# Altium PCB ROS_CAR.PcbDoc (part 2 of 13)
Units mil, origin at the board's own origin, x right, y up, seen from the top; angles counter-clockwise.
Board outline 3937.01 x 3937.01 mil, 2 copper layers (Top Layer, Bottom Layer); 201 components, 155 nets, 998 pads, 0 vias.
Unrouted connection lines stored in the file: 3.
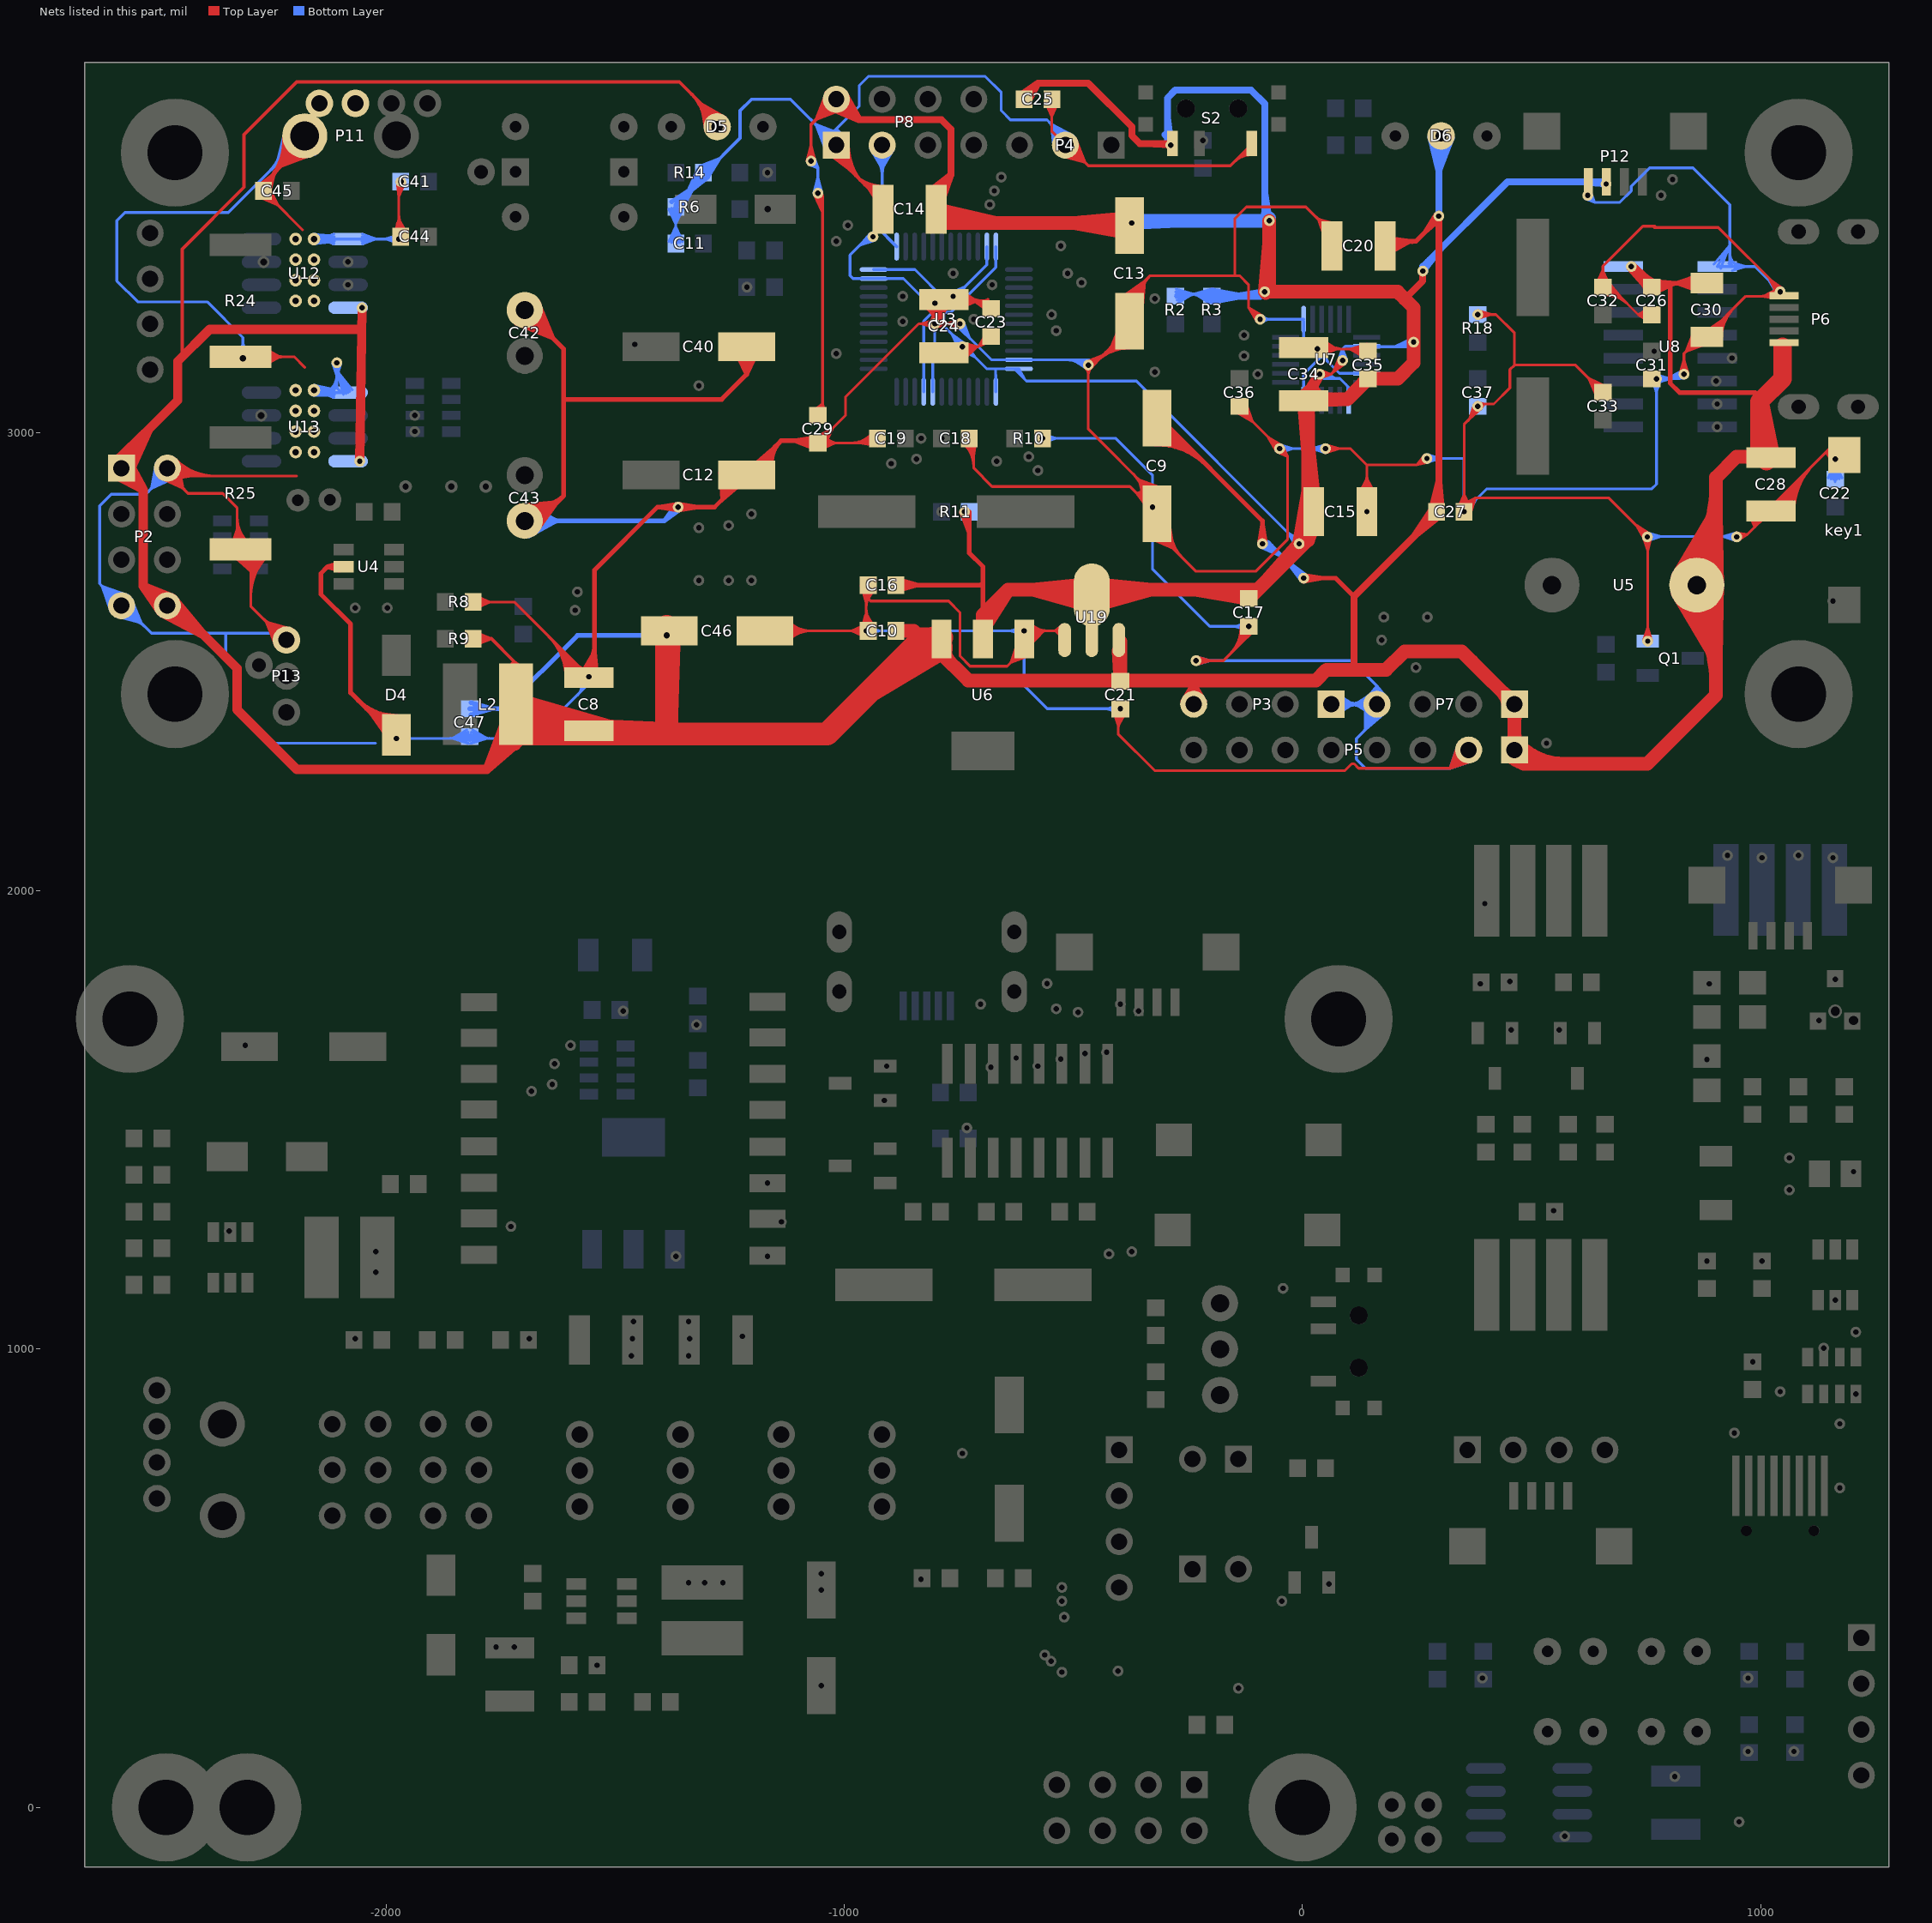
[diagram p2: the nets of this part, all layers, seen from the top]

## Nets (pads, with @x,y where several pads share a name; then routed paths per layer and width w, separated by ;. In a path a pad name is that pad's centre, name@x,y a point inside that pad or via, vN(x,y) a via of type N, cw(c..) or ccw(c..) an arc to the next point about the centre after c; other vN are vias at no path point) (continued)
CARVCC3.3: C13.1 C14.1 C15.1 C16.1 C17.1 C23.1 C24.1 C25.1 C29.1 C34.1 C35.2 P8.2 P12.3 pad.1@37.52,3127.09 pad.1@87.52,3157.09 pad.1@242.52,3197.09 pad.1@262.52,3352.09 pad.1@662.52,3542.09 pad.1@-7.48,2757.09 pad.1@-72.48,3462.09 pad.1@-82.48,3307.09 pad.1@-287.48,3627.09 pad.1@-372.48,3457.09 pad.1@-737.48,2827.09 pad.1@-742.48,3187.09 pad.1@-1057.48,3522.09 pad.1@-1072.48,3592.09 R2.1 R3.1 R11.1 S2.3 U3.1 U3.9 U3.24 U3.36 U3.48 U6.2 U7.8 U7.13 U19.2 | length 20620.8
  Top Layer w6: C24.1@-753.78,3187.7 -710.43,3187.09 ; C24.1@-753.45,3181.67 -710.43,3187.09 ; C24.1@-753.27,3193.79 -710.43,3187.09 ; C24.1@-750.79,3190.02 C24.1@-751.77,3174.02 ; C24.1@-750.02,3173.49 cw(c-731.71,3167.97) C24.1@-731.71,3187.09 ; C24.1@-748.74,3166.79 -710.43,3187.09 ; C24.1@-745.55,3161.66 -710.43,3187.09 ; C24.1@-744.27,3171.75 cw(c-723.63,3165.53) -723.63,3187.09 ; C24.1@-741.63,3156.97 -710.43,3187.09 ; C24.1@-741.12,3178.38 -712.2,3187.36 ; C24.1@-741.12,3195.79 -712.36,3186.84 ; C24.1@-738.53,3170.02 cw(c-715.56,3163.1) -715.56,3187.09 ; C24.1@-736.98,3180.21 C24.1@-751.77,3174.02 ; C24.1@-736.25,3180.86 cw(c-721.21,3165.82) -721.21,3187.09 cw(c-721.21,3208.36) C24.1@-736.25,3193.32 ; C24.1@-732.78,3168.29 cw(c-707.48,3160.66) -707.48,3187.09 ; -705.31,3188.98 ccw(c-727.53,3214.46) C23.1@-693.75,3216.05 ; -705.07,3189.5 ccw(c-732.34,3216.77) C23.1@-693.77,3216.77 ; -704.3,3190.34 ccw(c-730.72,3216.18) C23.1@-693.77,3216.6 ; -702.47,3190.31 ccw(c-713.96,3208.15) C23.1@-693.34,3213.16 ; -701.26,3189.91 ccw(c-708.12,3205.02) C23.1@-692.69,3211.13 ; -699.54,3196.62 ccw(c-719.27,3213.04) C23.1@-693.71,3215.38 ; C23.1@-695.95,3197.14 ccw(c-711.71,3215.21) C23.1@-687.76,3216.33 ; C23.1@-695.53,3192.51 ccw(c-702.26,3207.34) C23.1@-687.12,3213.34 ; C23.1@-695.38,3194.88 ccw(c-705.29,3210.26) C23.1@-687.51,3214.58 ; C23.1@-694.83,3199.74 ccw(c-711.86,3216.77) C23.1@-687.77,3216.77 ; C23.1@-694.17,3200.7 ccw(c-710.24,3216.41) C23.1@-687.77,3216.67 ; C23.1@-687.48,3207.09 -707.48,3187.09 ; C23.1@-685.81,3222.49 -707.48,3187.09 ; C34.1@-13.06,3081.63 27.52,3117.09 ; C34.1@-8.81,3077.29 27.52,3117.09 ; C34.1@-4.14,3073.48 27.52,3117.09 ; C34.1@2.52,3069.35 27.52,3117.09 ; C34.1@9.71,3066.23 27.52,3117.09 ; C34.1@15.5,3064.56 27.52,3117.09 ; C34.1@19.2,3083.38 ccw(c-0.87,3103.45) 27.52,3103.45 ; C34.1@21.48,3063.54 27.52,3117.09 ; C34.1@27.52,3085.86 cw(c73.3,3085.86) pad.1@43.29,3120.43 ; C34.1@27.52,3087.09 27.52,3117.09 ; 27.52,3094.66 ccw(c50.11,3094.66) C34.1@37.57,3075.87 ; 27.52,3099.01 cw(c61.89,3099.01) pad.1@39.36,3124.96 ; 27.52,3105.87 ccw(c57.58,3105.87) C34.1@40.9,3080.86 ; 27.52,3112.16 cw(c50.47,3112.16) pad.1@35.43,3129.5 ; pad.1@28.82,3128.45 C34.1@27.52,3091.81 ; pad.1@28.95,3129.12 C34.1@24.69,3092 ; pad.1@29.13,3129.78 22.14,3093.58 ; pad.1@29.35,3130.4 19.93,3095.43 ; pad.1@29.69,3131.13 17.61,3098.16 ; pad.1@30.07,3131.79 15.78,3100.91 ; pad.1@30.4,3132.27 13.99,3102.27 ; pad.1@30.75,3132.73 12.53,3103.98 ; pad.1@39.07,3118.41 62.52,3127.09 ; pad.1@39.07,3135.76 62.52,3127.09 ; pad.1@42.61,3119.9 12.53,3103.98 ; pad.1@43.08,3120.25 13.99,3102.27 ; pad.1@43.51,3120.63 15.78,3100.91 ; pad.1@43.75,3120.86 cw(c58.79,3105.82) 58.79,3127.09 cw(c58.79,3148.36) pad.1@43.75,3133.32 ; pad.1@44.09,3121.22 17.61,3098.16 ; C34.1@44.23,3085.85 cw(c65.06,3117.08) 27.52,3117.08 ; pad.1@44.64,3121.9 19.93,3095.43 ; pad.1@45.03,3122.48 22.14,3093.58 ; pad.1@45.38,3123.11 C34.1@24.69,3092 ; pad.1@45.65,3123.68 C34.1@27.52,3091.81 ; 68.94,3133.51 ccw(c45.37,3157.09) pad.1@78.71,3157.09 ; 79.19,3143.75 ccw(c65.85,3157.09) pad.1@84.71,3157.09 ; pad.1@80,3161.69 66.33,3130.9 ; 81.01,3145.58 cw(c87.52,3139.08) pad.1@87.52,3148.28 ; pad.1@87.52,3152.09 62.52,3127.09 ; pad.1@87.52,3157.09 66.33,3130.9 ; pad.1@93.59,3150.7 66.33,3130.9 ; C24.1@-751.77,3174.02 pad.1@-742.48,3187.09 ; C24.1@-751.77,3174.02 -710.43,3187.09 ; pad.1@-742.48,3187.09 -712.2,3187.36 ; pad.1@-742.48,3187.09 -710.43,3187.09 ; pad.1@-742.48,3187.09 -712.67,3187.12 ; pad.1@-742.48,3187.09 -712.36,3186.84 ; pad.1@-742.48,3187.09 -707.48,3187.09 ; -712.67,3187.12 -741.17,3178.37 -712.67,3187.09 -741.18,3195.8 -712.67,3187.12 ; -712.36,3186.84 -741.26,3178.36 -710.43,3187.09 ; -712.2,3187.36 -741.28,3195.82 -710.43,3187.09 ; 12.53,3103.98 pad.1@37.52,3127.09 ; 13.99,3102.27 pad.1@37.52,3127.09 ; 15.78,3100.91 pad.1@37.52,3127.09 ; 17.61,3098.16 pad.1@37.52,3127.09 ; 19.93,3095.43 pad.1@37.52,3127.09 ; 22.14,3093.58 pad.1@37.52,3127.09 ; C34.1@24.69,3092 pad.1@37.52,3127.09 ; C34.1@27.52,3091.81 pad.1@37.52,3127.09 ; 27.52,3117.09 pad.1@37.52,3127.09 ; pad.1@37.52,3127.09 62.52,3127.09
  Top Layer w7: pad.1@-1080.72,3593.14 -1072.48,3624.9 pad.1@-1064.24,3593.14 ; pad.1@-1078.36,3597.96 ccw(c-1092.54,3612.15) -1072.48,3612.15 ccw(c-1052.42,3612.15) pad.1@-1066.6,3597.96 ; pad.1@-1072.48,3592.09 -1072.48,3672.09 P8.2@-1017.48,3727.09 ; C29.1@-1068.41,3046.19 -1047.48,3062.09 ; pad.1@-1065.32,3519.33 -1047.48,3481.18 ; pad.1@-1063.36,3516.21 cw(c-1101.69,3477.88) -1047.48,3477.88 ; C29.1@-1063.35,3041.14 -1047.48,3062.09 ; pad.1@-1058.41,3521.16 cw(c-1084.79,3494.78) -1047.48,3494.78 ; C29.1@-1057.48,3037.4 -1057.48,3052.09 -1047.48,3062.09 ; C29.1@-1056.5,3037.4 -1047.48,3062.09 ; pad.1@-1053.46,3526.11 cw(c-1067.89,3511.68) -1047.48,3511.68 ; pad.1@-1049.25,3523.25 -1047.48,3481.18 ; C29.1@-1048.85,3035.84 -1047.48,3062.09 ; P8.2@-1043.51,3727.09 cw(c-1106.34,3727.09) -1061.91,3682.66 cw(c-1017.48,3638.22) P8.2@-1017.48,3701.06 ; C29.1@-1041.72,3036.45 -1047.48,3062.09 ; P8.2@-1039.3,3741.27 -1061.86,3682.71 ; P8.2@-1036.51,3727.09 cw(c-1082.44,3727.09) -1049.96,3694.6 cw(c-1017.48,3662.12) P8.2@-1017.48,3708.06 ; P8.2@-1032.82,3738.35 -1061.86,3682.71 ; P8.2@-1026.76,3734.74 -1061.86,3682.71 ; P8.2@-1021.17,3730.5 -1061.86,3682.71 ; P8.2@-1014.07,3723.39 -1061.86,3682.71 ; P8.2@-1009.83,3717.81 -1061.86,3682.71 ; P8.2@-1006.22,3711.75 -1061.86,3682.71 ; P8.2@-1003.29,3705.27 -1061.86,3682.71 ; -1047.48,3062.09 -1047.48,3512.09 pad.1@-1057.48,3522.09 -1047.48,3481.18
  Top Layer w10: C16.1@-887.17,2667.09 -702.48,2667.09 -697.48,2672.09 ; C16.1@-885.33,2653.91 -838.86,2667.09 C16.1@-885.33,2680.27 ; C16.1@-877.76,2657.68 cw(c-855.04,2634.96) -855.04,2667.09 cw(c-855.04,2699.21) C16.1@-877.76,2676.5 ; C14.1@-815.44,3525.62 -797.48,3542.09 ; C14.1@-807.02,3519.66 -797.48,3542.09 ; C14.1@-803.04,3535.26 ccw(c-804.45,3542.09) -797.48,3542.09 ; C14.1@-799.41,3517.8 -797.48,3542.09 ; C14.1@-797.48,3467.09 -797.48,3542.09 ; C14.1@-792.28,3534.14 cw(c-788.81,3542.09) -797.48,3542.09 ; C14.1@-791.6,3518.44 -797.48,3542.09 ; C14.1@-782.35,3522.99 -797.48,3542.09 ; pad.1@-744,2825.11 -727.48,2782.42 ; pad.1@-742.3,2822.27 cw(c-778.07,2786.5) -727.48,2786.5 ; pad.1@-737.48,2827.09 -727.48,2782.42 ; pad.1@-735.23,2829.34 cw(c-753.92,2810.64) -727.48,2810.64 ; pad.1@-730.74,2828.08 -727.48,2782.42 ; pad.1@-727.48,2827.09 -727.48,2737.09 -697.48,2707.09 -697.48,2602.09 ; U6.2@-697.48,2549.13 U6.2@-697.48,2557.09
  Top Layer w15: P8.2@-1029.34,3708.52 -967.48,3682.09 ; P8.2@-1017.48,3705.06 cw(c-1017.48,3639.81) -971.34,3685.95 ; P8.2@-1000.26,3740.83 -967.48,3682.09 ; P8.2@-995.45,3727.09 ccw(c-954.34,3727.09) -983.41,3698.02 ; C14.1@-810.47,3528.42 -767.48,3562.09 ; C14.1@-799.41,3517.8 -767.48,3562.09 ; C14.1@-797.48,3532.09 -767.48,3562.09 ; C14.1@-785.83,3510.66 -767.48,3562.09 ; C14.1@-784.1,3518.64 cw(c-727.16,3521.76) -767.48,3562.08 ; C25.1@-614.95,3736.17 -577.48,3762.09 ; C25.1@-607.8,3727.09 -607.8,3731.77 -577.48,3762.09 ; C25.1@-607.8,3728.07 -577.48,3762.09 ; C25.1@-607.8,3738.88 ccw(c-607.8,3756.03) C25.1@-595.66,3743.9 ; C25.1@-598.93,3721.89 -577.48,3762.09 ; C25.1@-596.99,3728.07 cw(c-561.96,3728.07) -586.73,3752.84 ; -350.71,3630.32 S2.3@-284.09,3630.32 -340.91,3630.32 pad.1@-287.48,3627.09 -344.52,3630.32 ; -350,3630 -355,3630 -372.48,3647.48 -372.48,3667.09 -467.48,3762.09 -577.48,3762.09 ; -305.68,3630.32 cw(c-305.68,3608.89) S2.3@-290.53,3624.04 ; 223.23,3291.38 262.52,3330.67 pad.1@262.52,3352.09 ; -967.48,3682.09 P8.2@-1017.48,3727.09 -1012.48,3727.09 -967.48,3682.09 ; -967.48,3682.09 -787.48,3682.09 -767.48,3662.09 -767.48,3562.09
  Top Layer w30: C14.1@-799.41,3487.09 -669.93,3457.09 ; C14.1@-792.48,3457.09 pad.1@-372.48,3457.09 ; U6.2@-697.48,2557.09 -697.48,2602.09 ; U6.2@-690.83,2569.8 cw(c-596.82,2569.8) -663.29,2636.27 ; -546.78,2657.09 cw(c-546.78,2558.73) U19.2@-477.23,2628.28 ; -486.71,3454.76 pad.1@-372.48,3457.09 ; -480.03,3458.81 pad.1@-372.48,3457.09 ; -476.24,3456.01 pad.1@-372.48,3457.09 ; U19.2@-464.4,2621.54 -590.4,2657.09 ; U19.2@-460.11,2669.88 -590.4,2657.09 ; U19.2@-459.89,2669.88 -329.3,2657.09 ; U19.2@-455.61,2621.54 -329.3,2657.09 ; U19.2@-442.77,2628.28 cw(c-373.22,2558.73) -373.22,2657.09 ; -430.99,3457.09 cw(c-430.99,3397.91) C13.1@-389.14,3439.75 ; C13.1@-377.83,3467.91 -499.35,3457.09 ; C13.1@-377.48,3451.42 -499.35,3457.09 ; -234.53,2657.09 C17.1@-118.46,2637.4 ; -173.97,2657.09 cw(c-173.97,2581.89) C17.1@-120.8,2635.06 ; pad.1@-80.23,3304.83 ccw(c-98.92,3323.53) -72.48,3323.53 ; -78.18,2676.39 pad.1@-7.48,2757.09 ; -72.48,3360.28 pad.1@-72.48,3462.09 -72.48,3307.09 207.52,3307.09 223.23,3291.38 242.52,3272.09 242.52,3152.09 207.52,3117.09 ; -72.48,3412.08 pad.1@-82.48,3307.09 19.33,3307.09 ; -35.35,2719.21 C17.1@-116.5,2637.4 ; C34.1@-12.48,3072.09 97.83,3072.09 ; pad.1@-5.23,2754.83 ccw(c-48.07,2797.67) C15.1@12.52,2797.67 ; C34.1@-3.02,3063.81 cw(c-40.54,3026.29) 12.52,3026.29 ; pad.1@-1.2,2753.36 ccw(c-44.22,2796.38) C15.1@16.61,2796.38 ; C34.1@2.52,3069.35 12.52,2954.9 ; 12.52,2764.75 cw(c39.87,2764.75) C15.1@27.88,2789.34 ; C15.1@12.52,2869.67 pad.1@-7.48,2757.09 ; 12.52,2905.51 ccw(c72.16,2905.51) C15.1@29.99,2863.34 ; 12.52,2971.44 C15.1@24.45,2857.8 ; C34.1@12.52,3072.09 12.52,2767.09 ; C34.1@33.23,3069.35 97.83,3072.09 ; C34.1@38.77,3063.81 cw(c58.75,3043.83) 58.75,3072.09 ; C35.2@141.54,3116.77 97.83,3072.09 ; C35.2@143.5,3116.77 207.52,3117.09 ; U6.2@-697.48,2569.8 -697.48,2602.09 ; U6.2@-697.48,2569.8 -642.48,2657.09 ; U6.2@-697.48,2569.8 -697.48,2602.09 ; -697.48,2602.09 -642.48,2657.09 ; -642.48,2657.09 -97.48,2657.09 ; -590.4,2657.09 U19.2@-460,2645.51 -329.3,2657.09 ; -499.35,3457.09 -379.36,3435.03 pad.1@-372.48,3457.09 ; C17.1@-116.5,2637.4 -97.48,2657.09 ; C17.1@-116.5,2637.4 -97.48,2657.09 ; -97.48,2657.09 12.52,2767.09 ; pad.1@-7.48,2757.09 12.52,2767.09 ; pad.1@-7.48,2757.09 C15.1@24.45,2796.38 ; pad.1@-7.48,2757.09 12.52,2767.09 ; pad.1@-7.48,2757.09 -48.75,2705.81 C15.1@24.45,2796.38 ; pad.1@-7.48,2757.09 C15.1@24.45,2796.38 ; pad.1@-7.48,2757.09 12.52,2767.09 ; pad.1@-7.48,2757.09 C15.1@24.45,2796.38 ; pad.1@-7.48,2757.09 12.52,2767.09 ; 12.52,2767.09 C15.1@24.45,2796.38 ; 12.52,2767.09 C15.1@24.45,2796.38 ; 97.83,3072.09 142.83,3117.09 207.52,3117.09
  Bottom Layer w6: U3.24@-935.94,3355.35 -845.75,3355.35 -782.48,3292.09 -782.48,3232.09 -689.21,3138.82 U3.48@-619.02,3138.82 -606.31,3115.91 ; U3.24@-910.35,3355.35 -887.43,3355.35 ; U3.9@-826.69,3088.62 -826.69,3242.87 -807.48,3262.09 -767.48,3262.09 -669.21,3360.35 ; U3.9@-826.69,3114.21 -826.69,3137.13 ; -761.06,3210.66 cw(c-784.63,3187.09) pad.1@-751.29,3187.09 ; -750.81,3200.42 cw(c-764.15,3187.09) pad.1@-745.29,3187.09 ; pad.1@-749.98,3182.46 -764.06,3213.66 ; -748.99,3198.59 ccw(c-742.48,3205.1) pad.1@-742.48,3195.9 ; pad.1@-747.11,3179.59 -715.86,3165.47 ; pad.1@-742.48,3178.28 cw(c-742.48,3144.93) -718.9,3168.51 ; pad.1@-742.48,3184.28 cw(c-742.48,3165.42) -729.15,3178.75 ; pad.1@-736.41,3193.47 -764.06,3213.66 ; pad.1@-736.09,3193.16 -715.86,3165.47 ; pad.1@-733.67,3187.09 ccw(c-724.47,3187.09) -730.97,3180.58 ; U3.1@-669.21,3088.62 -670,3138.82 U3.1@-669.21,3114.21 ; U3.36@-669.21,3379.96 -669.21,3360.35 ; U3.36@-669.21,3405.55 -669.21,3360.35 ; -667.53,3138.82 U3.48@-644.61,3138.82 ; U3.48@-627.48,3137.09 -602.48,3112.09 -362.48,3112.09 pad.1@-7.48,2757.09 -32.02,2781.63 ; R2.1@-277.48,3297.09 -272.48,3302.09 R3.1@-202.48,3302.09 ; R2.1@-276.77,3300.7 -239.77,3302.09 ; R2.1@-276.5,3297.4 -239.77,3302.09 ; R2.1@-276.5,3306.71 -239.77,3302.09 ; R2.1@-275.93,3294.14 -239.77,3302.09 ; R2.1@-275.25,3312.66 -239.77,3302.09 ; R2.1@-274.17,3288.39 -239.77,3302.09 ; R2.1@-274.16,3295.06 cw(c-257.2,3278.11) -257.2,3302.09 ; R2.1@-271.46,3282.95 -239.77,3302.09 ; R2.1@-269.91,3290.82 cw(c-242.72,3263.62) -242.72,3302.09 ; R2.1@-265.67,3286.58 cw(c-228.23,3249.14) -228.23,3302.09 ; R2.1@-265.67,3308.23 ccw(c-250.85,3323.05) -250.85,3302.09 ; -246.73,3302.09 cw(c-246.73,3249.14) R3.1@-209.29,3286.58 ; -232.24,3302.09 cw(c-232.24,3263.62) R3.1@-205.05,3290.82 ; -224.11,3302.09 ccw(c-224.11,3323.05) R3.1@-209.29,3308.23 ; -217.76,3302.09 cw(c-217.76,3278.11) R3.1@-200.8,3295.06 ; R3.1@-203.5,3282.95 -235.19,3302.09 ; R3.1@-200.79,3288.39 -235.19,3302.09 ; R3.1@-199.71,3312.66 -235.19,3302.09 ; R3.1@-199.03,3294.14 -235.19,3302.09 ; R3.1@-198.46,3297.4 -235.19,3302.09 ; R3.1@-198.46,3306.71 -235.19,3302.09 ; R3.1@-198.19,3300.7 -235.19,3302.09 ; pad.1@-16.29,2757.09 ccw(c-37.56,2757.09) -22.52,2772.13 ccw(c-7.48,2787.17) pad.1@-7.48,2765.9 ; pad.1@-14.45,2751.7 -32.02,2781.63 ; pad.1@-2.09,2764.06 -32.02,2781.63 ; pad.1@36.33,3118.36 71.83,3117.98 ; pad.1@40.82,3135.26 71.83,3117.98 ; pad.1@78.85,3158.64 87.52,3182.09 ; pad.1@81.29,3163.32 ccw(c66.25,3178.36) 87.52,3178.36 ccw(c108.79,3178.36) pad.1@93.75,3163.32 ; pad.1@87.52,3157.09 87.52,3182.09 ; 94.74,3104.86 cw(c84.41,3094.53) U7.13@99.02,3094.53 ; pad.1@96.19,3158.64 87.52,3182.09 ; U7.13@100.94,3069.92 100.94,3098.66 81.63,3117.98 46.63,3117.98 pad.1@37.52,3127.09 71.83,3117.98 ; U7.8@115.71,3188.03 93.46,3188.03 ; U7.8@140.31,3188.03 93.46,3188.03 ; -764.06,3213.66 pad.1@-742.48,3187.09 -715.86,3165.47 ; 87.52,3182.09 93.46,3188.03
  Bottom Layer w7: pad.1@-1077.09,3585.17 -1057.48,3577.09 ; pad.1@-1072.48,3583.78 cw(c-1072.48,3563.71) -1058.29,3577.9 cw(c-1044.1,3592.09) pad.1@-1064.17,3592.09 ; pad.1@-1072.48,3592.09 -1057.48,3577.09 ; pad.1@-1065.72,3523.14 -1057.48,3554.9 pad.1@-1049.24,3523.14 ; pad.1@-1065.57,3596.7 -1057.48,3577.09 ; pad.1@-1063.36,3527.96 ccw(c-1077.54,3542.15) -1057.48,3542.15 ccw(c-1037.42,3542.15) pad.1@-1051.6,3527.96 ; pad.1@-1057.48,3522.09 -1057.48,3577.09 ; U7.8@152.52,3187.09 232.52,3187.09 pad.1@242.52,3197.09 202.65,3187.09 ; U7.8@164.92,3188.03 190.85,3187.09 ; U7.8@165.93,3189.04 ccw(c170.63,3193.74) 170.63,3187.09 ; 198.31,3187.09 ccw(c198.31,3241.29) pad.1@236.64,3202.96 ; 215.21,3187.09 ccw(c215.21,3224.39) pad.1@241.59,3198.01 ; 232.11,3187.09 ccw(c232.11,3207.49) pad.1@246.54,3193.06 ; pad.1@239.69,3204.9 202.65,3187.09 ; pad.1@243.72,3188.86 202.65,3187.09
  Bottom Layer w15: -300,3649.61 cw(c-320.04,3629.56) pad.1@-291.78,3627.41 ; -295,3655.65 ccw(c-258.92,3655.65) pad.1@-284.43,3630.14 ; -295,3685.64 pad.1@-287.48,3627.09 ; pad.1@-287.48,3637.09 -295,3644.61 ; pad.1@-285.87,3631.09 cw(c-280.42,3644.61) -295,3644.61 ; R3.1@-197.48,3297.4 -92.17,3297.4 pad.1@-82.48,3307.09 -146.11,3297.4 ; R3.1@-196.5,3297.4 -133.19,3297.4 ; R3.1@-195.57,3286.63 -133.19,3297.4 ; R3.1@-195.57,3308.17 -133.19,3297.4 ; R3.1@-188.85,3289.76 cw(c-170.41,3271.31) -170.41,3297.4 cw(c-170.41,3323.49) R3.1@-188.85,3305.04 ; -116.27,3297.4 ccw(c-116.27,3340.88) pad.1@-85.53,3310.14 ; -83.38,3477.98 cw(c-99.27,3462.09) pad.1@-76.79,3462.09 ; -82.48,3496.64 ccw(c-37.93,3496.64) pad.1@-69.43,3465.14 ; -82.48,3522.27 pad.1@-72.48,3462.09 ; pad.1@-72.48,3467.09 -82.48,3477.09 ; pad.1@-72.28,3466.39 cw(c-71.78,3477.09) -82.48,3477.09 ; pad.1@262.52,3352.09 302.37,3401.93 ; pad.1@262.52,3357.09 262.52,3362.09 447.52,3547.09 pad.1@652.52,3547.09 ; pad.1@266.83,3352.09 cw(c301.38,3352.09) 276.95,3376.52 ; 602.46,3547.09 pad.1@662.52,3542.09 ; 640.04,3547.09 cw(c640.04,3519.61) pad.1@659.47,3539.04 ; -295,3644.61 pad.1@-287.48,3627.09 ; -295,3644.61 pad.1@-287.48,3627.09 ; -295,3644.61 -295,3729.57 -277.48,3747.09 -112.48,3747.09 -82.48,3717.09 -82.48,3477.09 ; -82.48,3477.09 pad.1@-72.48,3462.09 ; -82.48,3477.09 pad.1@-72.48,3462.09
  Bottom Layer w30: pad.1@-372.48,3457.09 -269.15,3462.09 ; pad.1@-367.48,3462.09 pad.1@-72.48,3462.09 pad.1@-72.48,3467.09
CARVCC5: C8.1 C9.1 C10.2 C20.1 C21.1 C26.2 C27.1 C28.2 C30.1 C46.1 C47.1 D5.2 D6.2 L2.2 P2.1 P2.8 P3.4 P5.1 P6.5 P7.1 pad.1@2.52,2682.09 pad.1@297.52,3472.09 pad.1@717.52,3362.09 pad.1@-87.48,2757.09 pad.1@-2052.48,3272.09 pad.1@-2057.48,2937.09 pad.11@-1387.48,2557.09 R9.1 U5.1 U6.3 U8.16 U12.4 U13.4 U19.3 | length 26392.9
  Top Layer w7: -2445,3170 -2445,3400 -2310,3535 -2310,3650 -2195,3765 -1360,3765 -1333.33,3738.33 -1333.33,3737.93 -1332.93,3737.93 D5.2@-1270,3675 ; R9.1@-1810.16,2550.08 -1770.47,2550.08 -1720.47,2500.08 ; R9.1@-1809.38,2542.31 -1770.85,2550.08 ; R9.1@-1809.38,2557.85 -1770.85,2550.08 ; R9.1@-1807.37,2535.54 -1770.85,2550.08 ; R9.1@-1807.37,2564.62 -1770.85,2550.08 ; R9.1@-1804.64,2544.56 cw(c-1791.31,2531.23) -1791.31,2550.08 cw(c-1791.31,2568.93) R9.1@-1804.64,2555.6 ; R9.1@-1799.69,2539.61 cw(c-1774.41,2514.33) -1774.41,2550.08 cw(c-1774.41,2585.83) R9.1@-1799.69,2560.55 ; L2.2@-1748.64,2468.92 -1720.47,2500.08 ; L2.2@-1742.65,2464.41 -1720.47,2500.08 ; L2.2@-1736.15,2461.11 -1720.47,2500.08 ; L2.2@-1729.34,2459.02 -1720.47,2500.08 ; L2.2@-1727.43,2490.34 ccw(c-1730.76,2500.08) -1720.47,2500.08 ; L2.2@-1722.36,2458.12 -1720.47,2500.08 ; L2.2@-1720.47,2445.08 -1720.47,2500.08 ; L2.2@-1713.15,2492.01 cw(c-1712.36,2500.08) -1720.47,2500.08 ; L2.2@-1710.64,2459.24 -1720.47,2500.08 ; L2.2@-1703.96,2461.46 -1720.47,2500.08 ; L2.2@-1697.66,2464.81 -1720.47,2500.08 ; L2.2@-1691.91,2469.28 -1720.47,2500.08 ; L2.2@-1686.89,2474.85 -1720.47,2500.08 ; -1333.6,3738.6 cw(c-1405.12,3667.09) D5.2@-1303.98,3667.09 ; -1321.65,3726.65 cw(c-1381.22,3667.09) D5.2@-1296.98,3667.09 ; -1309.7,3714.7 cw(c-1357.32,3667.09) D5.2@-1289.98,3667.09 ; D5.2@-1302.06,3657.19 -1311.74,3716.74 ; -1297.75,3702.75 cw(c-1333.42,3667.09) D5.2@-1282.98,3667.09 ; -1296.44,3701.44 ccw(c-1277.48,3720.4) D5.2@-1277.48,3693.59 ; D5.2@-1295.11,3658.75 -1311.74,3716.74 ; D5.2@-1288.45,3661.09 -1311.74,3716.74 ; D5.2@-1282.14,3664.17 -1311.74,3716.74 ; D5.2@-1277.48,3667.09 -1311.74,3716.74 ; D5.2@-1273.1,3670.41 -1311.74,3716.74 ; D5.2@-1267.98,3675.21 -1311.74,3716.74 ; D5.2@-1263.43,3680.61 -1311.74,3716.74 ; D5.2@-1259.51,3686.56 -1311.74,3716.74
  Top Layer w10: pad.1@-2057.48,3267.09 pad.1@-2052.48,3272.09 ; L2.2@-1745.66,2416.87 cw(c-1723.52,2370.65) L2.2@-1687.28,2406.89 ; L2.2@-1741.34,2407.85 cw(c-1717.05,2357.15) -1677.3,2396.9 ; L2.2@-1737.02,2398.83 cw(c-1710.58,2343.64) -1667.31,2386.91 ; L2.2@-1732.7,2389.81 cw(c-1704.11,2330.13) -1657.32,2376.93 ; L2.2@-1728.38,2380.8 cw(c-1697.64,2316.63) -1647.33,2366.94 ; L2.2@-1726.68,2376.34 -1647.46,2367.07 ; L2.2@-1724.86,2386.32 -1647.46,2367.07 ; L2.2@-1724.06,2371.78 cw(c-1691.17,2303.12) -1637.34,2356.95 ; L2.2@-1721.83,2395.91 -1647.46,2367.07 ; L2.2@-1719.74,2362.76 cw(c-1684.7,2289.61) -1627.36,2346.96 ; L2.2@-1717.48,2342.09 L2.2@-1707.48,2342.09 ; L2.2@-1716.46,2407.09 -1647.46,2367.07 ; L2.2@-1712.48,2407.09 -1687.48,2407.09 -1627.48,2347.09 ; L2.2@-1709.42,2417.3 -1647.46,2367.07 ; L2.2@-1702.61,2424.69 -1647.46,2367.07 ; L2.2@-1694.85,2431.23 -1647.46,2367.07 ; -1626.59,2347.09 cw(c-1626.59,2310.62) C8.1@-1600.8,2336.4 ; C8.1@-1602.51,2359.65 cw(c-1627.48,2378.19) -1627.48,2347.09 ; C8.1@-1593.08,2366.17 -1627.48,2347.09 ; C8.1@-1591.38,2331.47 -1627.48,2347.09 ; C8.1@-1589.35,2356.76 -1627.48,2347.09 ; C8.1@-1588.59,2341.19 -1627.48,2347.09 ; C8.1@-1588.19,2349.02 -1627.48,2347.09 ; C8.1@-1547.48,2347.09 -1627.48,2347.09 ; C9.1@-320.61,2984.71 -262.22,2981.83 ; C9.1@-320.23,2974.55 -262.22,2981.83 ; C9.1@-319.26,2994.66 -262.22,2981.83 ; C9.1@-317.48,2974.41 cw(c-317.48,2823.09) -210.48,2930.09 ; C9.1@-317.48,2984.41 cw(c-317.48,2857.24) -227.55,2947.16 ; C9.1@-317.48,2994.41 cw(c-317.48,2891.38) -244.63,2964.23 ; C9.1@-317.48,3000.91 -262.22,2981.83 ; C9.1@-317.48,3004.41 cw(c-317.48,2925.52) -261.7,2981.3 ; C9.1@-317.48,3014.41 cw(c-317.48,2959.66) -278.77,2998.37 ; C9.1@-317.48,3031.42 -311.81,3031.42 -87.48,2807.09 pad.1@-87.48,2757.09 ; C9.1@-315.02,3006.92 -262.22,2981.83 ; C9.1@-309.95,3015.58 -262.22,2981.83 ; C9.1@-303.38,3023.34 -262.22,2981.83 ; P3.4@-261.15,2413.5 -237.48,2453.96 ; P3.4@-251.83,2409.34 -237.48,2453.96 ; P3.4@-251.46,2427.24 ccw(c-270,2453.96) -237.48,2453.96 ; P3.4@-237.48,2407.09 -237.48,2453.96 ; P3.4@-223.5,2427.24 cw(c-204.96,2453.96) -237.48,2453.96 ; P3.4@-223.13,2409.34 -237.48,2453.96 ; P3.4@-213.81,2413.5 -237.48,2453.96 ; pad.1@-94.27,2757.64 -87.48,2798.9 pad.1@-80.69,2757.64 ; pad.1@-92.3,2761.9 ccw(c-103.92,2773.53) -87.48,2773.53 ccw(c-71.04,2773.53) pad.1@-82.66,2761.9 ; pad.1@2.52,2682.09 72.52,2682.09 112.52,2642.09 ; pad.1@3.07,2675.3 44.33,2682.09 pad.1@3.07,2688.88 ; pad.1@7.34,2677.27 cw(c18.96,2665.64) 18.96,2682.09 cw(c18.96,2698.53) pad.1@7.34,2686.9 ; C20.1@179.72,3414.87 234.74,3417.09 ; C20.1@180.23,3424.92 234.74,3417.09 ; C20.1@180.59,3407.09 234.74,3417.09 ; C20.1@182.56,3399.5 234.74,3417.09 ; C20.1@186.15,3401.56 cw(c223.47,3364.45) 223.47,3417.09 ; C20.1@186.63,3390.3 234.74,3417.09 ; C20.1@187.52,3417.09 247.52,3417.09 ; C20.1@193.24,3394.51 cw(c247.52,3340.54) 247.52,3417.09 ; 282.36,3451.92 ccw(c262.19,3472.09) pad.1@290.71,3472.09 ; pad.1@292.04,3476.13 267.32,3436.88 ; pad.1@297.52,3467.09 247.52,3417.09 ; pad.1@297.52,3472.09 267.32,3436.88 ; pad.1@302.35,3467.28 267.32,3436.88 ; pad.1@712.12,3357.94 741.62,3325.08 ; pad.1@713.03,3356.96 C26.2@750.22,3328.91 ; pad.1@713.07,3356.93 750.54,3329.06 pad.1@722.67,3366.54 ; pad.1@714.17,3356.16 754.28,3337.4 ; pad.1@717.52,3355.28 cw(c717.52,3338.83) 729.15,3350.46 cw(c740.77,3362.09) pad.1@724.33,3362.09 ; pad.1@721.74,3367.43 754.28,3337.4 ; pad.1@722.71,3366.5 C26.2@750.22,3328.91 ; pad.1@723.5,3365.35 741.62,3325.08 ; 738.35,3341.26 cw(c714.49,3317.4) C26.2@748.23,3317.4 ; 739.96,3339.65 ccw(c761.54,3361.22) C26.2@761.54,3330.71 ; C26.2@750.99,3309.28 pad.1@722.78,3356.83 ; C26.2@761.54,3317.4 pad.1@722.78,3356.83 ; C26.2@762.52,3317.4 762.2,3317.4 pad.1@717.52,3362.09 ; C26.2@763.06,3330.7 813.86,3325.75 ; C26.2@763.5,3317.4 813.86,3325.75 ; C26.2@765.84,3315.06 cw(c791.64,3289.27) 791.64,3325.75 ; C26.2@767.37,3304.67 813.86,3325.75 ; C26.2@769.83,3327.8 pad.1@722.78,3356.83 ; C26.2@770.87,3325.75 C30.1@882.52,3325.75 ; C26.2@772.91,3307.99 cw(c815.78,3265.13) 815.78,3325.75 ; 802.52,3325.75 802.52,3107.09 822.52,3087.09 987.52,3087.09 997.52,3077.09 ; C30.1@857.14,3313.55 ccw(c827.7,3284.12) 827.7,3325.75 ccw(c827.7,3367.38) C30.1@857.14,3337.94 ; C30.1@866.48,3308.74 817.09,3325.75 ; C30.1@866.48,3342.76 817.09,3325.75 ; C30.1@868.83,3318.52 817.09,3325.75 ; C30.1@868.83,3332.97 817.09,3325.75 ; C30.1@869.33,3325.75 817.09,3325.75 ; pad.1@717.52,3362.09 754.28,3337.4 ; pad.1@717.52,3362.09 C26.2@750.22,3328.91 ; pad.1@717.52,3362.09 741.62,3325.08
  Top Layer w15: P2.1@-2577.48,2912.09 P2.1@-2567.09,2912.09 ; L2.2@-1744.47,2345.46 -1716.46,2313.11 ; L2.2@-1731.13,2353.31 -1716.46,2313.11 ; L2.2@-1726.74,2327.83 cw(c-1732.13,2313.11) -1716.46,2313.11 ; L2.2@-1716.46,2355.91 -1716.46,2313.11 ; L2.2@-1716.46,2407.09 -1716.46,2313.11 ; L2.2@-1706.17,2327.83 ccw(c-1700.79,2313.11) -1716.46,2313.11 ; L2.2@-1701.78,2353.31 -1716.46,2313.11 ; L2.2@-1688.44,2345.46 -1716.46,2313.11 ; 112.52,2482.09 112.52,2642.09 297.52,2827.09 pad.1@297.52,3477.09 ; 270.69,2800.26 ccw(c244.85,2826.1) C27.1@281.4,2826.1 ; C27.1@281.15,2810.72 cw(c292.2,2799.66) C27.1@292.2,2815.3 ; C27.1@281.55,2829.87 297.52,2892.06 ; C27.1@283.71,2832.78 244.33,2773.9 ; C27.1@284.56,2835.71 ccw(c253.28,2866.99) 297.52,2866.99 ; C27.1@292.2,2826.1 244.33,2773.9 ; C27.1@292.2,2828.07 297.52,2892.06 ; 297.52,3415.28 pad.1@297.52,3472.09 ; C27.1@299.59,2818.21 244.33,2773.9 ; C27.1@303.01,2828.09 297.52,2892.06
  Top Layer w20: P2.1@-2592.34,2934.75 -2517.52,3007.48 ; P2.1@-2589.06,2906.36 -2530,2875 ; P2.1@-2577.95,2922.09 cw(c-2517.69,2922.09) -2560.3,2964.7 ; P2.1@-2577.48,2902.56 cw(c-2577.48,2854.47) -2543.47,2888.47 ; P2.1@-2577.48,2912.09 -2577.48,2947.52 -2455,3070 -2455,3155 -2385,3225 -2057.48,3225 ; P2.1@-2567.09,2912.09 -2530,2875 ; P2.1@-2561.85,2933.8 -2530,2875 ; P2.1@-2560.52,2912.41 -2517.52,3007.48 ; -2544.42,2889.42 cw(c-2511.76,2922.09) -2557.95,2922.09 cw(c-2449.41,2922.09) -2526.16,2998.84 ; -2525,2659.6 ccw(c-2481.34,2703.26) P2.8@-2478.41,2641.59 ; -2503.74,2638.35 cw(c-2520.01,2622.09) P2.8@-2497.01,2622.09 ; P2.8@-2491.83,2608.84 -2530,2664.61 ; P2.8@-2488.22,2605.78 -2398.15,2558.15 ; P2.8@-2483.05,2617.66 -2457.66,2617.66 -2325,2485 -2325,2395 -2195,2265 -1780,2265 ; P2.8@-2477.48,2602.56 cw(c-2477.48,2518.25) -2417.87,2577.87 ; P2.8@-2477.48,2612.09 -2530,2664.61 ; P2.8@-2467.51,2638.88 -2530,2664.61 ; P2.8@-2463.83,2636.05 -2398.15,2558.15 ; pad.1@-2057.48,2937.09 pad.1@-2052.48,3272.09 ; -1766.32,2278.68 ccw(c-1824.54,2336.9) L2.2@-1743.44,2351.16 ; L2.2@-1740.68,2368.71 -1780,2265 ; -1739.13,2305.87 ccw(c-1778.3,2345.03) L2.2@-1723.75,2354.62 ; L2.2@-1720.73,2324.27 -1780,2265 ; L2.2@-1716.46,2355.91 -1780,2265 ; L2.2@-1696.11,2337.55 -1780,2265 ; -2530,2664.61 P2.8@-2477.48,2622.09 -2398.15,2558.15 ; -2530,2664.61 -2530,2875 ; -2530,2875 P2.1@-2577.48,2922.09 -2517.52,3007.48
  Top Layer w30: C10.2@-887.17,2567.09 -848.39,2567.09 -830.43,2549.13 ; U6.3@-792.48,2522.09 -729.36,2458.96 29.39,2458.96 52.52,2482.09 182.52,2482.09 222.52,2522.09 347.52,2522.09 P7.1@462.52,2407.09 ; U6.3@-781.38,2528.46 ccw(c-739.18,2528.46) -769.02,2498.62 ; -506.83,2458.96 C21.1@-398.46,2457.4 ; U19.3@-400.94,2523.46 C21.1@-397.48,2457.4 U19.3@-397.48,2543.62 ; C21.1@-396.5,2457.4 -288.13,2458.96 ; 369.35,2500.25 P7.1@462.52,2407.09 ; P7.1@447.99,2407.09 ccw(c412.92,2407.09) 437.72,2431.89 ccw(c462.52,2456.69) P7.1@462.52,2421.61 ; P5.1@451.58,2296.15 ccw(c497.59,2342.16) 497.59,2277.09 ; P5.1@452.25,2317.36 ccw(c427.45,2342.16) 462.52,2342.16 ccw(c497.59,2342.16) 472.79,2317.36 ccw(c570.02,2414.59) 570.02,2277.09 ; P7.1@452.25,2396.81 cw(c427.45,2372.01) 462.52,2372.01 cw(c497.59,2372.01) P7.1@472.79,2396.81 ; U5.1@819.04,2649.63 902.52,2509.32 ; U5.1@819.05,2684.56 902.52,2824.75 ; U5.1@828.7,2635.27 cw(c650.48,2457.05) 902.52,2457.05 ; U5.1@828.7,2698.91 ccw(c650.48,2877.12) 902.52,2877.12 ; U5.1@849.91,2656.48 cw(c722.91,2529.48) 902.52,2529.48 ; U5.1@849.91,2677.69 ccw(c722.91,2804.7) 902.52,2804.7 ; U5.1@871.13,2656.48 ccw(c795.34,2732.27) 902.52,2732.27 ; U5.1@871.13,2677.69 cw(c795.34,2601.9) 902.52,2601.9 ; U5.1@905.19,2661.61 902.52,2824.75 ; U5.1@905.19,2672.56 902.52,2509.32 ; 968.24,2947.09 cw(c968.24,2921.59) C28.2@986.27,2939.62 ; C28.2@991.81,2945.16 947.52,2947.09 ; C28.2@1012.52,2937.09 1002.52,2947.09 947.52,2947.09 ; P5.1@462.52,2297.09 P7.1@462.52,2407.09 ; P5.1@462.52,2297.09 482.52,2277.09 752.52,2277.09 902.52,2427.09 902.52,2902.09 947.52,2947.09 ; P5.1@462.52,2297.09 P7.1@462.52,2407.09 ; P7.1@462.52,2407.09 P5.1@462.52,2307.09 P7.1@462.52,2407.09 ; 902.52,2509.32 U5.1@860.52,2667.09 902.52,2824.75
  Top Layer w40: C28.2@1012.52,2937.09 997.52,2952.09 997.52,3067.09 ; C28.2@1022.52,2945.16 997.52,3067.09 ; 1047.52,3187.09 1047.52,3117.09 997.52,3067.09
  Top Layer w50: L2.2@-1707.69,2364.67 ccw(c-1653.16,2419.21) -1653.16,2342.09 ; -1387.48,2352.09 C46.1@-1387.48,2577.09 ; -1387.48,2385.31 C46.1@-1381.81,2567.09 ; pad.11@-1387.48,2557.09 -1387.25,2392.73 ; -1353.58,2342.09 -1526.77,2349.02 -1489.8,2342.09 L2.2@-1716.46,2407.09 -1588.19,2349.02 -1707.48,2342.09 -1037.48,2342.09 -830.43,2549.13 ; -943,2436.57 U6.3@-788.03,2528.46 ; -889.99,2489.58 cw(c-788.03,2387.62) U6.3@-788.03,2531.81 ; -851.63,2527.94 cw(c-792.12,2468.43) U6.3@-787.86,2552.48 ; -830.43,2549.13 U6.3@-788.03,2549.13 ; -830.43,2549.13 U6.3@-788.03,2549.13 ; -830.43,2549.13 U6.3@-788.03,2549.13
  Bottom Layer w7: D5.2@-1277.48,3677.09 D5.2@-1277.48,3682.09
  Bottom Layer w10: C47.1@-1817.48,2397.4 -1742.17,2397.4 -1582.48,2557.09 pad.11@-1387.48,2557.09 -1431.26,2557.09 ; C47.1@-1816.5,2397.4 -1768.19,2397.4 ; C47.1@-1814.66,2384.22 -1768.19,2397.4 ; C47.1@-1814.66,2410.58 -1768.19,2397.4 ; C47.1@-1807.09,2387.99 cw(c-1784.37,2365.28) -1784.37,2397.4 cw(c-1784.37,2429.53) C47.1@-1807.09,2406.81 ; pad.11@-1393.69,2550.88 ccw(c-1408.68,2535.89) -1408.68,2557.09 ccw(c-1408.68,2578.28) pad.11@-1393.69,2563.29 ; pad.11@-1388.36,2548.35 -1431.26,2557.09 ; pad.11@-1388.36,2565.82 -1431.26,2557.09 ; pad.1@-90.7,2751.08 -46.82,2731.42 ; pad.1@-89.25,2759.74 cw(c-82.36,2749.43) -73.59,2758.2 ; pad.1@-87.48,2750.28 cw(c-87.48,2697.62) -50.25,2734.85 ; pad.1@-87.48,2760.28 cw(c-87.48,2731.76) -67.32,2751.92 ; pad.1@-83.69,2751.43 cw(c-75.46,2739.11) -64.98,2749.59 ; pad.1@-83.45,2762.57 -46.82,2731.42 ; pad.1@-82.35,2752.6 cw(c-72.48,2743.98) -72.48,2757.09 ; pad.1@-82.35,2761.57 ccw(c-72.48,2770.2) -72.48,2757.09 ; pad.1@-4.29,2682.09 ccw(c-20.73,2682.09) -9.11,2693.71 ccw(c2.52,2705.34) pad.1@2.52,2688.9 ; pad.1@-2.63,2677.63 -30.5,2715.11 ; pad.1@6.97,2687.24 -30.5,2715.11 ; pad.1@-87.48,2757.09 -72.48,2757.09 ; pad.1@-87.48,2757.09 -46.82,2731.42 ; pad.1@-87.48,2757.09 -72.48,2757.09 ; -72.48,2757.09 -85.93,2750.45 -72.48,2757.09 ; -72.48,2757.09 -85.93,2763.72 -72.48,2757.09 ; -72.48,2757.09 pad.1@2.52,2682.09 -30.5,2715.11
  Bottom Layer w15: D6.2@280.1,3645.22 297.52,3571.66 ; D6.2@286.61,3631.18 cw(c260.27,3604.84) 297.52,3604.84 ; pad.1@297.52,3472.09 297.52,3637.09 D6.2@312.52,3652.09 ; 297.52,3580.7 cw(c368.91,3580.7) D6.2@318.43,3631.18 ; 297.52,3616.91 cw(c332.7,3616.91) D6.2@307.82,3641.78 ; D6.2@302.52,3647.09 297.52,3571.66 ; D6.2@324.5,3642.27 297.52,3571.66
CE: P8.3 U3.25 | length 837.7
  Bottom Layer w7: P8.3@-942.63,3620.38 -917.48,3576.56 ; P8.3@-936.17,3623.5 -917.48,3576.56 ; P8.3@-935.88,3608.68 cw(c-980.32,3564.25) -917.48,3564.25 cw(c-854.64,3564.25) P8.3@-899.08,3608.68 ; P8.3@-930.93,3613.63 cw(c-963.42,3581.15) -917.48,3581.15 cw(c-871.54,3581.15) P8.3@-904.03,3613.63 ; P8.3@-929.42,3625.66 -917.48,3576.56 ; P8.3@-922.5,3626.84 -917.48,3576.56 ; P8.3@-917.48,3627.09 -917.48,3437.28 U3.25@-885.75,3405.55 -905.52,3425.32 ; P8.3@-912.46,3626.84 -917.48,3576.56 ; P8.3@-905.54,3625.66 -917.48,3576.56 ; P8.3@-898.79,3623.5 -917.48,3576.56 ; P8.3@-892.33,3620.38 -917.48,3576.56
CGND: C8.2 C9.2 C10.1 C11.2 C12.2 C13.2 C14.2 C15.2 C16.2 C17.2 C18.1 C19.1 C20.2 C21.2 C22.2 C23.2 C24.2 C25.2 C26.1 C27.2 C28.1 C29.2 C30.2 C31.1 C32.1 C33.1 C34.2 C35.1 C36.1 C37.1 C40.2 C41.2 C42.2 C43.2 C44.2 C45.2 C46.2 C47.2 D4.1 key1.2 P2.2 P2.7 P3.1 P4.2 P5.2 P6.1 P7.4 P8.1 P11.2 P12.4 P13.1 pad.0@-2066.93,3718 pad.0@-2145.67,3718 pad.1@32.52,3182.09 pad.1@50.12,2964.69 pad.1@140.59,2827.09 pad.1@271.49,2943.2 pad.1@352.52,2827.09 pad.1@382.52,3057.09 pad.1@382.52,3257.4 pad.1@622.52,3517.09 pad.1@752.52,2772.09 pad.1@753.31,2544.49 pad.1@772.52,3117.09 pad.1@832.52,3127.09 pad.1@947.52,2772.09 pad.1@1042.52,3307.09 pad.1@1162.52,2942.09 pad.1@-50.08,2964.69 pad.1@-92.48,3247.09 pad.1@-117.48,2576.77 pad.1@-232.48,2502.09 pad.1@-327.48,2837.09 pad.1@-397.48,2397.09 pad.1@-467.48,3147.09 pad.1@-567.17,2987.09 pad.1@-607.48,2567.09 pad.1@-747.48,3237.09 pad.1@-762.48,3297.09 pad.1@-802.48,3237.09 pad.1@-802.48,3282.09 pad.1@-937.48,3427.09 pad.1@-952.48,2567.09 pad.1@-1362.48,2837.09 pad.1@-1557.48,2467.09 pad.1@-1967.48,3547.09 pad.1@-1972.48,3422.09 pad.1@-1977.48,2332.09 pad.1@-2107.48,3152.09 pad.11@-2157.48,2957.09 pad.11@-2157.48,3002.09 pad.11@-2157.48,3047.09 pad.11@-2157.48,3092.09 pad.11@-2157.48,3287.09 pad.11@-2157.48,3332.09 pad.11@-2157.48,3377.09 pad.11@-2157.48,3422.09 pad.11@-2197.48,2957.09 pad.11@-2197.48,3002.09 pad.11@-2197.48,3047.09 pad.11@-2197.48,3092.09 pad.11@-2197.48,3287.09 pad.11@-2197.48,3332.09 pad.11@-2197.48,3377.09 pad.11@-2197.48,3422.09 pad.11@-2312.48,3162.09 Q1.2 R6.2 R8.2 R10.1 R14.1 R18.2 R24.2 R25.2 S2.1 U3.8 U3.23 U3.35 U3.47 U4.2 U6.1 U7.1 U7.11 U7.18 U8.1 U12.1 U13.1 U19.1 | length 93206.5